# EAGLE board turing_alarm_double5x5 (EAGLE 5.11)
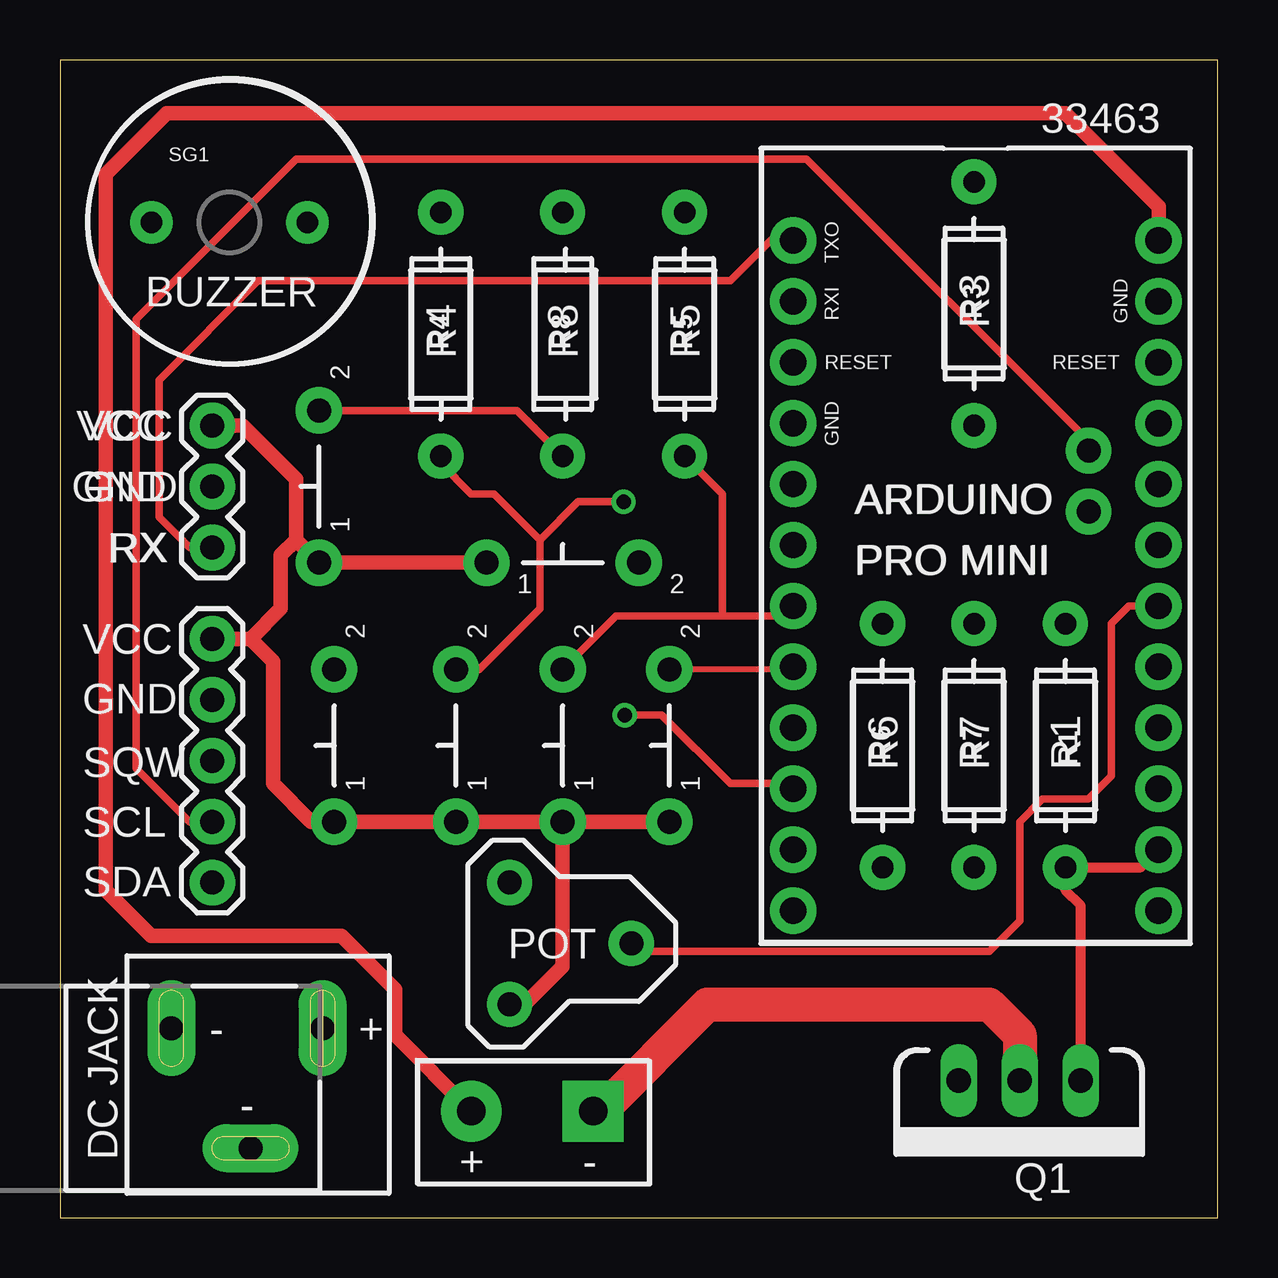
[diagram p0: board, top side]
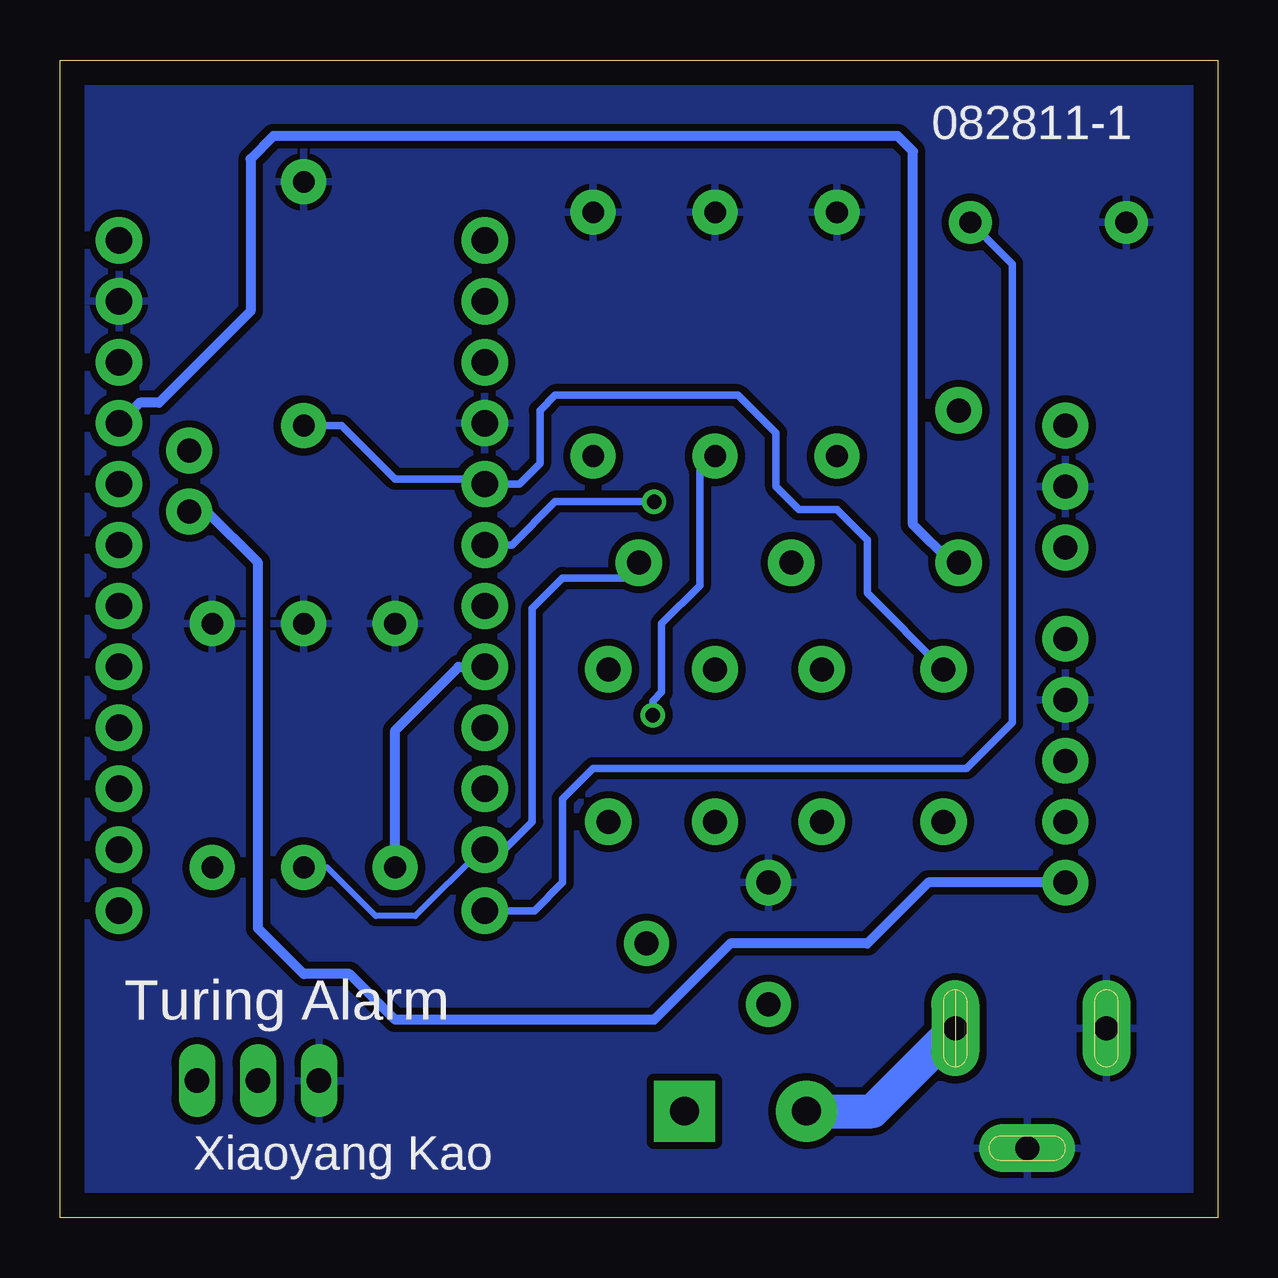
[diagram p1: board, bottom side, seen from below]

Size 48.26 x 48.26 mm. Coordinates in mm from the lower left corner, seen from the top.
Outline: 0,0 48.26,0 48.26,48.26 0,48.26 0,0
Copper layers (1*16): Top 0.035mm / dielectric 1.5mm / Bottom 0.035mm
Design rules "default": minimum track width 10mil, minimum drill 24mil, track to track 8mil, track to pad 8mil, pad to pad 8mil, via to via 8mil, smd to smd 8mil, copper to edge 40mil, drill to drill 8mil, minimum pad ring 10mil, minimum via ring 8mil, stop-mask expansion 4mil, vias tented up to drill 0mil, thermal gap 10mil

## Footprints (pad centres in the part's own frame; a part is rotated, then mirrored left to right if it is on the bottom)
MOMENTARY_SWITCH = drill 1 pad 1.93 round: 1 0,0; 2 6.35,0
POWER_JACK_SLOT = drill 1 pad 2 long: GND@1 2.58,7.5; GND@2 7.58,10.8; PWR 2.58,13.8
TO220V = drill 1.016 long: 1 -2.54,0; 2 0,0; 3 2.54,0
AXIAL-0.4 = drill 0.9 pad 1.88 round: P$1 -5.08,0; P$2 5.08,0
TRIM_POT = drill 1 pad 1.88 round: 1 5.08,0; 2 0,2.54; 3 0,-2.54
BUZZER-12MM = drill 0.9 pad 1.778 round: + 3.25,0; - -3.25,0
ARDUINO_PRO_MINI_5V = drill 1.1 pad 1.93 round: 2 -5.08,17.78; 3 -5.08,15.24; 4 -5.08,12.7; 5 -5.08,10.16; 6 -5.08,7.62; 7 -5.08,5.08; 8 -5.08,2.54; 9 -5.08,0; 10 10.16,0; 11 10.16,2.54; 12 10.16,5.08; 13 10.16,7.62; A0 10.16,10.16; A1 10.16,12.7; A2 10.16,15.24; A3 10.16,17.78; GND1 -5.08,20.32; GND2 10.16,25.4; RAW 10.16,27.94; RESET -5.08,22.86; RESET2 10.16,22.86; RXI -5.08,25.4; TXO -5.08,27.94; VCC2 10.16,20.32 | drill 1 pad 1.905 round: A4 7.239,16.637; A5 7.239,19.177
SERIAL_LCD_16X2 = drill 1 pad 1.905 round: GND 1.27,3.81; RX 1.27,6.35; VCC 1.27,1.27
RTC_MODULE_DS1307 = drill 1 pad 1.905 round: GND 1.27,3.81; SCL 1.27,8.89; SDA 1.27,11.43; SQW 1.27,6.35; VCC 1.27,1.27
LED_STRIP = drill 1.2 pad 2.54 round: A 2.54,0 | drill 1.2 pad 2.54 square: C -2.54,0

## Placement (x,y rotation side)
DECREASE  MOMENTARY_SWITCH  [MOMENTARY_SWITCH]  16.51,16.51 90 top
INCREASE  MOMENTARY_SWITCH  [MOMENTARY_SWITCH]  11.43,16.51 90 top
LEDSUPPLY  POWER_JACKSLT  [POWER_JACK_SLOT]  -2.86,10.48 270 top
LEFT  MOMENTARY_SWITCH  [MOMENTARY_SWITCH]  20.95,16.51 90 top
OK  MOMENTARY_SWITCH  [MOMENTARY_SWITCH]  17.78,27.3 0 top
Q1  MOSFET-NCHANNELPTH2  [TO220V]  40.01,5.71 180 top
R1  [AXIAL-0.4]  41.91,19.68 270 top
R2  [TRIM_POT]  18.73,11.43 0 top
R3  [AXIAL-0.4]  38.1,38.1 90 top
R4  [AXIAL-0.4]  15.88,36.83 90 top
R5  [AXIAL-0.4]  26.04,36.83 90 top
R6  [AXIAL-0.4]  34.29,19.68 90 top
R7  [AXIAL-0.4]  38.1,19.68 90 top
R8  [AXIAL-0.4]  20.95,36.83 90 top
RIGHT  MOMENTARY_SWITCH  [MOMENTARY_SWITCH]  25.4,16.51 90 top
SG1  BUZZERPTH  [BUZZER-12MM]  7.06,41.49 0 top
SNOOZE  MOMENTARY_SWITCH  [MOMENTARY_SWITCH]  10.79,27.3 90 top
U$1  ARDUINO_PRO_MINI_5V  [ARDUINO_PRO_MINI_5V]  35.64,12.8 0 top
U$2  SERIAL_LCD_16X2  [SERIAL_LCD_16X2]  7.62,34.29 180 top
U$3  RTC_MODULE_DS1307  [RTC_MODULE_DS1307]  7.62,25.4 180 top
U$4  LED_STRIP  [LED_STRIP]  19.68,4.45 180 top

## Library data of the parts
DECREASE INCREASE LEFT OK RIGHT SNOOZE U$1-U$4 = XYKlib
LEDSUPPLY Q1 R1-R8 SG1 = SparkFun

## Nets
2: INCREASE.2 R3.P$1 U$1.2
3: DECREASE.2 R4.P$1 U$1.3
4: LEFT.2 R5.P$1 U$1.4
5: R6.P$1 RIGHT.2 U$1.5
7: R8.P$1 SNOOZE.2 U$1.7
8: OK.2 R7.P$1 U$1.8
GND: LEDSUPPLY.GND@1 LEDSUPPLY.GND@2 Q1.3 R1.P$1 R2.2 R3.P$2 R4.P$2 R5.P$2 R6.P$2 R7.P$2 R8.P$2 SG1.- U$1.GND1 U$1.GND2 U$2.GND U$3.GND
N$1: U$1.TXO U$2.RX
N$2: U$1.A4 U$3.SDA
N$3: U$1.A5 U$3.SCL
N$4: SG1.+ U$1.9
N$5: Q1.1 R1.P$2 U$1.11
N$7: Q1.2 U$4.C
N$8: R2.1 U$1.A1
V+: LEDSUPPLY.PWR U$1.RAW U$4.A
VCC: DECREASE.1 INCREASE.1 LEFT.1 OK.1 R2.3 RIGHT.1 SNOOZE.1 U$1.VCC2 U$2.VCC U$3.VCC

## Tracks (layer width: path | path; a pad name or v marks a point on that pad's centre or on a via)
2
  Bottom 0.305: INCREASE.2 14.61,26.04 14.61,28.26 15.88,29.53 17.46,29.53 18.41,30.48 18.41,32.7 20,34.29 27.62,34.29 28.26,33.66 28.26,31.43 29.11,30.58 U$1.2 30.77,30.8 34.29,30.8 36.51,33.02 R3.P$1
3  (via drill 0.6)
  Top 0.305: DECREASE.2 17.46,22.86 20,25.4 20,28.26 | 20,28.26 18.1,30.16 17.14,30.16 15.88,31.43 R4.P$1 | 20,28.26 21.59,29.84 v23.5,29.84
  Bottom 0.305: v23.5,29.84 27.62,29.84 29.43,28.04 U$1.3
4
  Top 0.305: LEFT.2 23.18,25.08 27.62,25.08 | 27.62,25.08 30.16,25.08 30.48,25.4 | 30.48,25.4 30.56,25.48 U$1.4 30.48,25.43 30.48,25.4 | R5.P$1 27.62,30.16 27.62,25.08
5
  Top 0.254: RIGHT.2 30.48,22.86 U$1.5
  Bottom 0.406: R6.P$1 34.29,20.32 31.65,22.96 U$1.5
7  (via drill 0.61)
  Top 0.305: U$1.7 30.34,18.1 27.94,18.1 25.08,20.95 v23.55,20.95 | R8.P$1 19.05,33.66 SNOOZE.2
  Bottom 0.305: R8.P$1 21.59,31.11 21.59,26.35 23.18,24.77 23.18,21.91 23.55,21.54 v23.55,20.95
8
  Bottom 0.254: R7.P$1 37.13,14.61 35.1,12.57 33.45,12.57 30.68,15.34 U$1.8
  Bottom 0.305: OK.2 24.77,26.67 27.3,26.67 28.57,25.4 28.57,16.51 29.74,15.34 U$1.8
GND
  pour Bottom (isolate 0.305): 0,48.26 48.26,48.26 48.26,0 0,0
N$1
  Top 0.305: U$2.RX 5.4,27.94 4.13,29.21 4.13,34.92 8.26,39.05 27.94,39.05 29.63,40.74 U$1.TXO
N$2
  Bottom 0.406: U$3.SDA 12.06,13.97 14.61,11.43 20.32,11.43 23.5,8.26 34.29,8.26 36.2,10.16 38.1,10.16 40.01,12.06 40.01,27.3 42.14,29.44 U$1.A4
N$3
  Top 0.305: U$3.SCL 5.4,16.51 3.17,18.73 3.17,37.47 9.84,44.13 31.11,44.13 42.88,32.37 U$1.A5
N$4
  Bottom 0.305: SG1.+ 8.57,39.75 8.57,20.64 10.48,18.73 26.04,18.73 27.3,17.46 27.3,13.97 28.47,12.8 U$1.9
N$5
  Top 0.406: U$1.11 45.06,14.61 R1.P$2 41.91,13.65 42.55,13.02 Q1.1
N$7
  Top 1.422: Q1.2 40.01,7.62 38.73,8.89 26.99,8.89 22.54,4.45 U$4.C
N$8
  Top 0.305: U$1.A1 44.55,25.5 43.81,24.77 43.81,18.41 42.86,17.46 40.96,17.46 40.01,16.51 40.01,12.38 38.73,11.11 24.13,11.11 R2.1
V+
  Top 0.61: U$4.A 13.97,7.62 13.97,9.53 11.75,11.75 3.81,11.75 1.91,13.65 1.91,43.5 4.45,46.04 41.91,46.04 45.8,42.15 U$1.RAW
  Bottom 1.422: LEDSUPPLY.PWR 14.39,4.45 U$4.A
VCC
  Top 0.254: SNOOZE.1 10.72,27.41
  Top 0.61: U$2.VCC 7.62,33.02 9.84,30.8 9.84,28.26 | 9.84,28.26 SNOOZE.1 OK.1 | 9.84,28.26 9.21,27.62 9.21,25.4 7.94,24.13 | 7.94,24.13 U$3.VCC | 7.94,24.13 8.89,23.18 8.89,18.1 10.48,16.51 INCREASE.1 DECREASE.1 LEFT.1 | LEFT.1 RIGHT.1 | LEFT.1 20.95,10.48 19.37,8.89 R2.3
  Bottom 0.406: U$1.VCC2 44.95,33.97 44.13,33.97 40.32,37.78 40.32,44.13 39.37,45.09 13.34,45.09 12.7,44.45 12.7,28.89 11.11,27.3 SNOOZE.1

## Text on the board
_tsilk: 33463 | BUZZER | R3 | R4 | R8 | R5 | VCC | GND | ARDUINO | RX | PRO MINI | VCC | GND | R6 | R7 | R1 | SQW | SCL | SDA | POT | - | + | - | DC JACK | + | -
_bsilk: 082811-1 | Turing Alarm | Xiaoyang Kao